# Altium PCB Core.PcbDoc
Units mil, origin at the board's own origin, x right, y up, seen from the top; angles counter-clockwise.
Board outline 2505 x 1435 mil, 2 copper layers (Top Layer, Bottom Layer); 112 components, 85 nets, 387 pads, 118 vias.
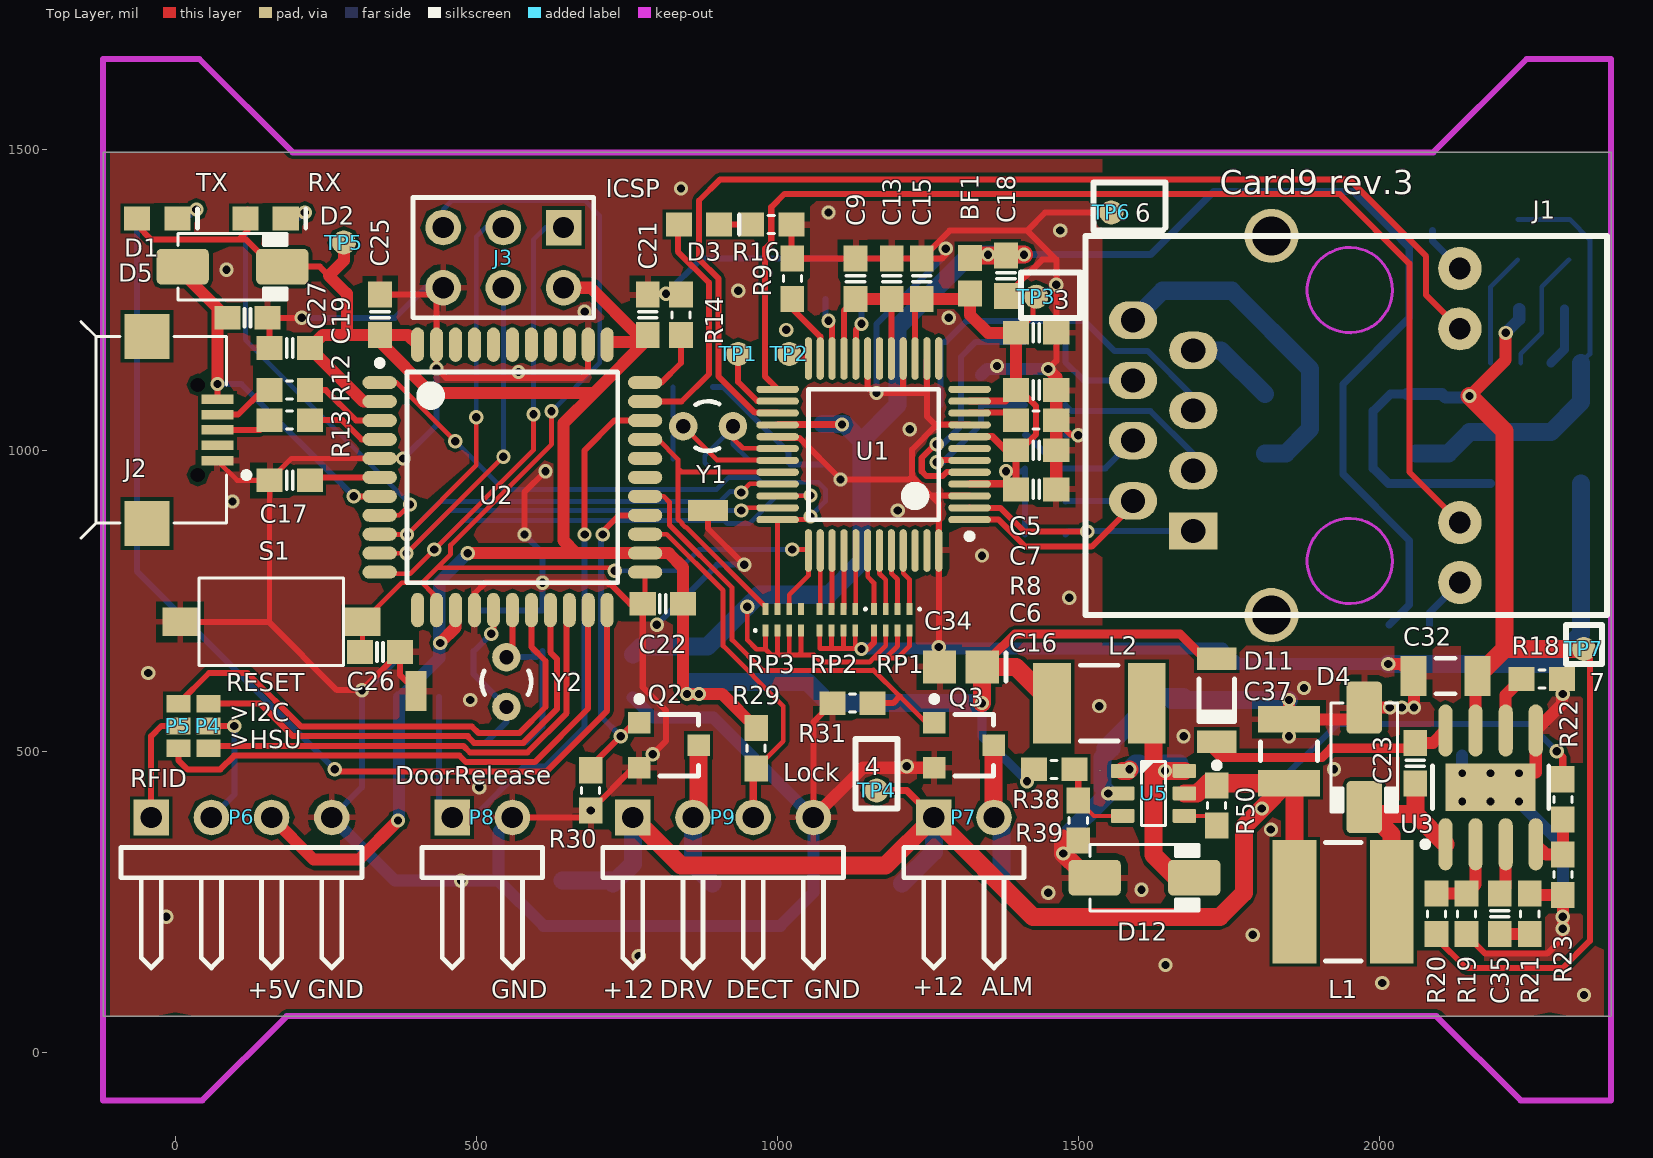
[diagram p0: Top Layer view]
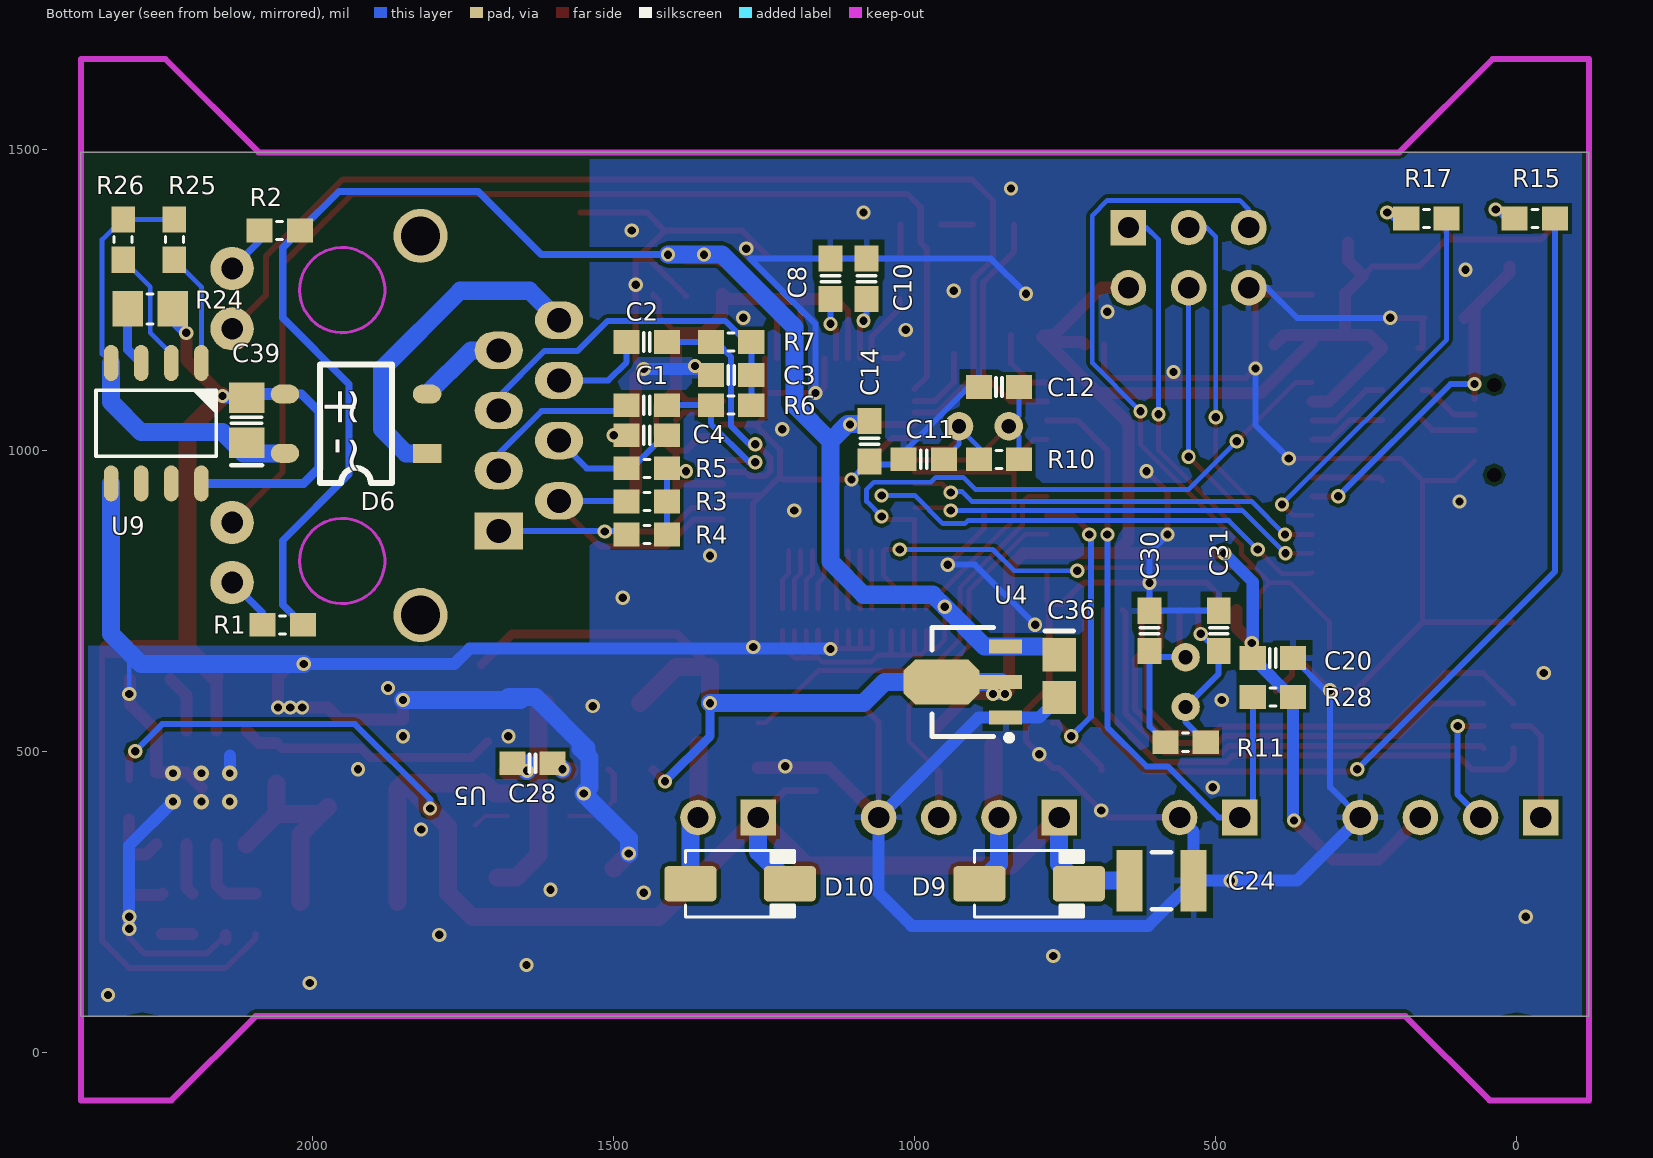
[diagram p1: Bottom Layer view, seen from below]
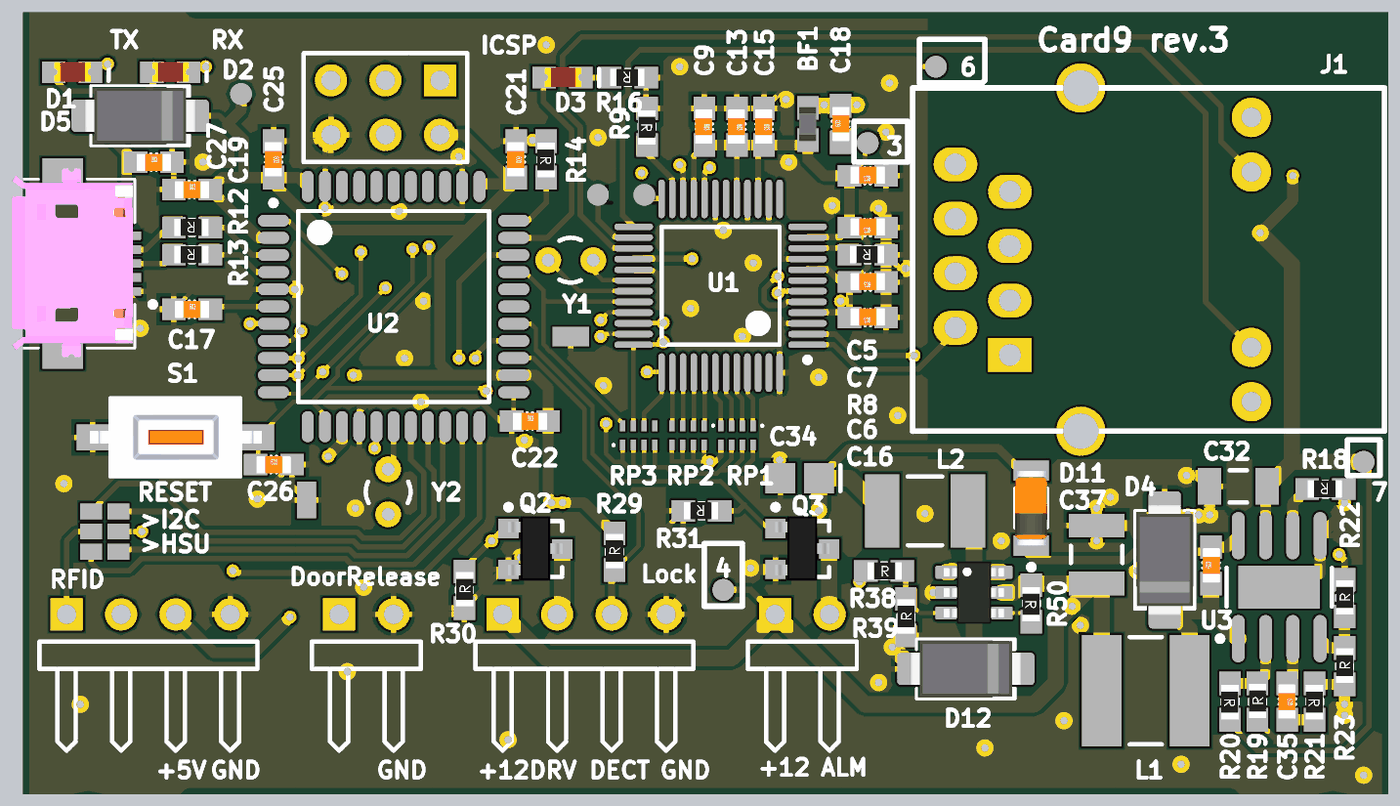
[diagram p2: 3D render of the assembled board from above, using the file's embedded part models]
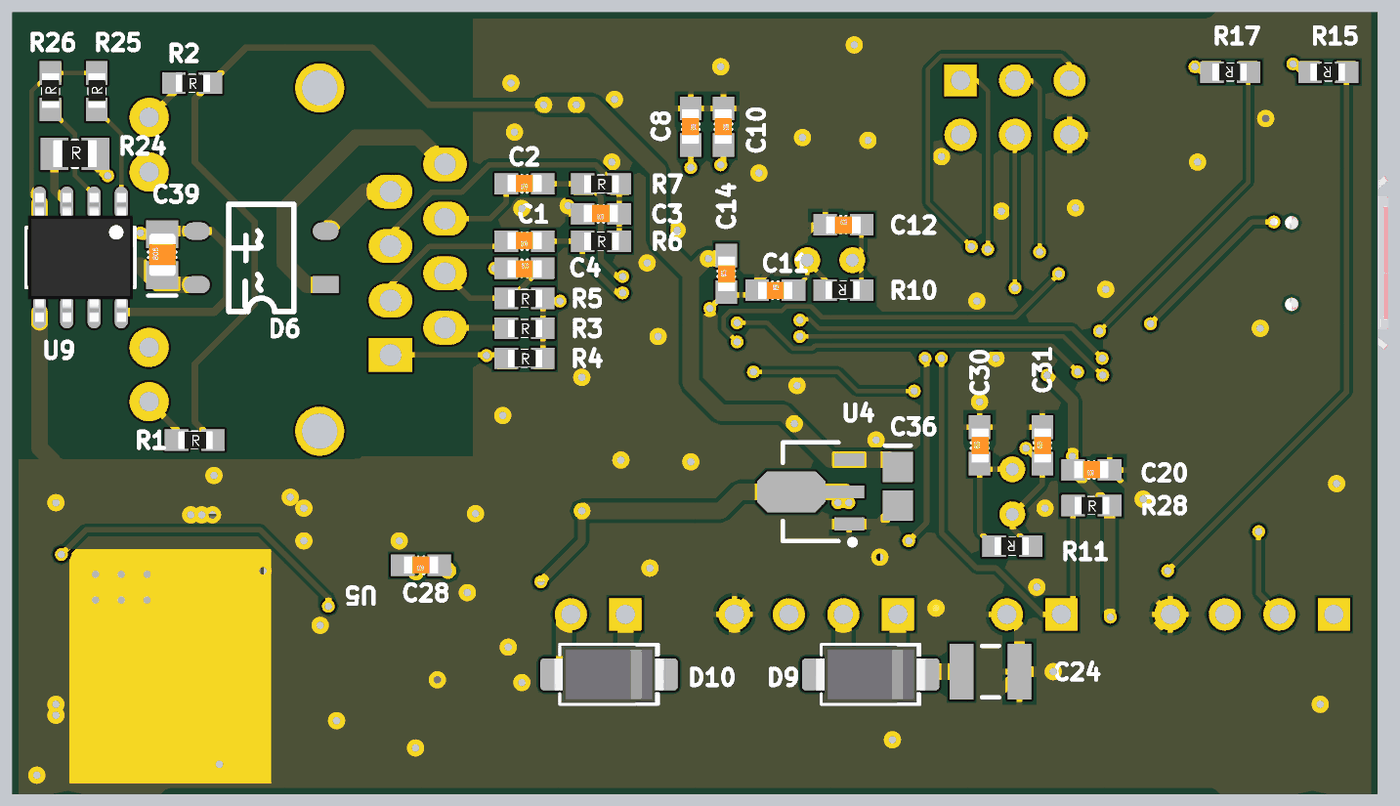
[diagram p3: 3D render of the assembled board from below, using the file's embedded part models]

## Layer stack, top to bottom
Top Solder: solder mask 0.4, Solder Resist, Dk 3.5
Top Layer: signal copper 1.4
Dielectric1: dielectric 12.6, FR-4, Dk 4.8
Bottom Layer: signal copper 1.4
Bottom Solder: solder mask 0.4, Solder Resist, Dk 3.5

## Board outline
-120,60 -120,1495 2385,1495 2385,60

## Design rules (kind name [scope] priority, off if disabled: settings)
Clearance [All] p1: gap=6
ComponentClearance [All] p1: gap=0 collisioncheckmode=3 verticalgap=0 showdistances=FALSE
HoleSize [All] p1: absolutevalues=TRUE maxlimit=196.85 minlimit=11.81 maxpercent=80.000 minpercent=20.000
HoleToHoleClearance [All] p1: gap=7.87 allowstackedmicrovias=TRUE
MinimumSolderMaskSliver [All] p1: minsoldermaskwidth=0
PolygonConnect PolygonConnect_1 [isvia vs IsPolygon] p1: connectstyle=Direct reliefconductorwidth=10 reliefentries=4 polygonreliefangle="90 Angle" airgapwidth=10
PolygonConnect [All] p2: connectstyle=Relief reliefconductorwidth=10 reliefentries=4 polygonreliefangle="90 Angle" airgapwidth=10
RoomDefinition power [InComponentClass('power')] p1 off: confinementstyle=ConfineIn formatcopy=TRUE lockcomponents=FALSE outline 2430,80 4060,80 4060,450 2430,450
RoomDefinition Sheet1 [InComponentClass('Sheet1')] p2 off: confinementstyle=ConfineIn formatcopy=TRUE lockcomponents=FALSE outline -610,-1100 12095,-1100 12095,1685 -610,1685
RoutingVias [All] p1: holewidth=13.78 width=23.62 viastyle="Through Hole" minholewidth=11.81 minwidth=19.68 maxholewidth=19.68 maxwidth=50
SilkToSilkClearance [All] p1: silktosilkclearance=0
SilkToSolderMaskClearance SilkscreenOverComponentPads [IsPad] p1: minsilkscreentomaskgap=0 clearancetoexposedcopper=TRUE
SolderMaskExpansion [All] p1: expansion=4
Width [All] p1: maxlimit=70 minlimit=7 preferedwidth=7
23 further rules are at their usual default settings.

## Classes and differential pairs
component class Sheet1: C1 C2 C3 C4 C8 C10 C11 C12 C17 C26 C27 C30 C31 D1 D2 D3 D9 D10 J1 J2 J3 M1 P4 P5 P6 P7 P8 P9 Q2 Q3 R1 R2 R3 R4 R5 R6 R7 R8 R9 R10 R11 R12 R13 R14 R15 R16 R17 R28 R29 R30 R31 RP1 RP2 RP3 S1 TP1 TP2 U1 U2 Y1 Y2
component class power: BF1 C5 C6 C7 C9 C13 C14 C15 C16 C18 C19 C20 C21 C22 C23 C24 C25 C28 C32 C34 C35 C36 C37 C39 D4 D5 D6 D11 D12 L1 L2 R18 R19 R20 R21 R22 R23 R24 R25 R26 R38 R39 R50 TP3 TP4 TP5 TP6 TP7 U3 U4 U5 U9

## Components (designator, comment, footprint, x,y, rotation, side; value= is the part's Value field where it differs from the comment)
BF1 "GZ1608D121TF" L-1608[0603] 1320,1290 r270 top
C1 "Cap Semi" C-1608[0603] 1445,1075 r0 bottom
C2 "Cap Semi" C-1608[0603] 1445,1180 r0 bottom
C3 "Cap Semi" C-1608[0603] 1305,1125 r0 bottom
C4 "Cap Semi" C-1608[0603] 1445,1025 r180 bottom
C5 "Cap Semi" C-1608[0603] 1430,1195 r180 top
C6 "Cap Semi" C-1608[0603] 1430,1000 r180 top
C7 "Cap Semi" C-1608[0603] 1430,1100 r180 top
C8 "Cap Semi" C-1608[0603] 1140,1285 r270 bottom
C9 "Cap Semi" C-1608[0603] 1130,1285 r270 top
C10 "Cap Semi" C-1608[0603] 1080,1285 r270 bottom
C11 "Cap Semi" C-1608[0603] 985,985 r180 bottom
C12 "Cap Semi" C-1608[0603] 860,1105 r180 bottom
C13 "Cap Semi" C-1608[0603] 1190,1285 r270 top
C14 "Cap Semi" C-1608[0603] 1075,1015 r90 bottom
C15 "Cap Semi" C-1608[0603] 1240,1285 r270 top
C16 "Cap Semi" C-1608[0603] 1430,935 r180 top
C17 "Cap Semi" C-1608[0603] 190,950 r0 top
C18 "Cap Semi" C-1608[0603] 1380,1290 r90 top
C19 "Cap Semi" C-1608[0603] 190,1170 r0 top
C20 "Cap Semi" C-1608[0603] 405,655 r0 bottom
C21 "Cap Semi" C-1608[0603] 785,1225 r270 top
C22 "Cap Semi" C-1608[0603] 810,745 r0 top
C23 "Cap Semi" C-1608[0603] 2060,480 r90 top
C24 "Cap Semi" CAPC3225L 590,285 r180 bottom
C25 "Cap Semi" C-1608[0603] 340,1225 r270 top
C26 "Cap Semi" C-1608[0603] 340,665 r0 top
C27 "Cap Semi" C-1608[0603] 120,1220 r0 top
C28 "Cap Semi" C-1608[0603] 1635,480 r0 bottom
C30 "Cap Semi" C-1608[0603] 610,700 r90 bottom
C31 "Cap Semi" C-1608[0603] 495,700 r90 bottom
C32 "100V" CAPC3216L 2110,625 r0 top
C34 "Tantalum" CAPC2512L 1305,640 r180 top
C35 "Cap Semi" C-1608[0603] 2200,230 r270 top
C36 "Tantalum" CAPC2512L 760,625 r270 bottom
C37 "Cap Semi" CAPC3225L 1850,500 r90 top
C39 "100V" C-2012[0805] 2110,1050 r90 bottom
D1 "TX" LED-1608[0603]-R -30,1385 r0 top
D2 "RX" LED-1608[0603]-R 150,1385 r0 top
D3 "L" LED-1608[0603]-R 870,1375 r0 top
D4 "SS310" DO-214AC 1975,490 r270 top
D5 "SS24" DO-214AC 95,1305 r0 top
D6 "MB6S" MB6S 1810,995 r0 bottom
D9 "SS24" DO-214AC 810,280 r180 bottom
D10 "SS24" DO-214AC 1290,280 r180 bottom
D11 "1N4148" LL-34 1730,585 r90 top
D12 "SS24" DO-214AC 1610,290 r0 top
J1 "RJ45 with PoE" HR911105A 2120,1025 r0 top
J2 "USB Micro Type B" "MICRO USB 3D" 70,1085 r180 top
J3 "ICSP" HDR2X3 645,1370 r180 top
L1 "Inductor" L-5040 1940,250 r180 top
L2 "Inductor" INDC4532N 1535,580 r180 top
P4 "U_I2C_SEL_1" shortPad 55,505 r90 top
P5 "U_I2C_SEL_2" shortPad 5,505 r90 top
P6 "RFID-PN532" HDR1X4H -40,390 r0 top
P7 "Alarm" HDR1X2H 1260,390 r0 top
P8 "Button" HDR1X2H 460,390 r0 top
P9 "Magnet" HDR1X4H 760,390 r0 top
Q2 "SI2302" SOT23B 820,510 r270 top
Q3 "SI2302" SOT23B 1310,510 r270 top
R1 "Res Semi" R-1608[0603] 2050,710 r180 bottom
R2 "Res Semi" R-1608[0603] 2055,1365 r180 bottom
R3 "Res Semi" R-1608[0603] 1445,915 r180 bottom
R4 "Res Semi" R-1608[0603] 1445,860 r180 bottom
R5 "Res Semi" R-1608[0603] 1445,970 r180 bottom
R6 "Res Semi" R-1608[0603] 1305,1075 r180 bottom
R7 "Res Semi" R-1608[0603] 1305,1180 r180 bottom
R8 "Res Semi" R-1608[0603] 1430,1050 r180 top
R9 "Res Semi" R-1608[0603] 1025,1285 r270 top
R10 "Res Semi" R-1608[0603] 860,985 r0 bottom
R11 "Res Semi" R-1608[0603] 550,515 r0 bottom
R12 "Res Semi" R-1608[0603] 190,1100 r180 top
R13 "Res Semi" R-1608[0603] 190,1050 r180 top
R14 "Res Semi" R-1608[0603] 840,1225 r270 top
R15 "Res Semi" R-1608[0603] -30,1385 r0 bottom
R16 "Res Semi" R-1608[0603] 990,1375 r180 top
R17 "Res Semi" R-1608[0603] 150,1385 r0 bottom
R18 "Res Semi" R-1608[0603] 2270,620 r180 top
R19 "Res Semi" R-1608[0603] 2145,230 r90 top
R20 "Res Semi" R-1608[0603] 2095,230 r270 top
R21 "Res Semi" R-1608[0603] 2250,230 r270 top
R22 "Res Semi" R-1608[0603] 2305,420 r90 top
R23 "Res Semi" R-1608[0603] 2305,295 r90 top
R24 "1/4W" R-2012[0805] 2270,1235 r180 bottom
R25 "Res Semi" R-1608[0603] 2230,1350 r90 bottom
R26 "Res Semi" R-1608[0603] 2315,1350 r90 bottom
R28 "Res Semi" R-1608[0603] 405,590 r180 bottom
R29 "Res Semi" R-1608[0603] 965,505 r90 top
R30 "Res Semi" R-1608[0603] 690,435 r90 top
R31 "Res Semi" R-1608[0603] 1125,580 r180 top
R38 "Res Semi" R-1608[0603] 1460,470 r0 top
R39 "Res Semi" R-1608[0603] 1500,385 r90 top
R50 "Res Semi" R-1608[0603] 1730,410 r270 top
RP1 "10K" EXB28V 1190,718.46 r180 top
RP2 "10K" EXB28V 1100,718.46 r180 top
RP3 "10K" EXB28V 1010,718.47 r0 top
S1 "RESET" SW-2pin-SMD 315,715 r180 top
TP1 "DUPLED" TESTPOINT#1 935,1160 r90 top
TP2 "SPDLED" TESTPOINT#2 1020,1160 r90 top
TP3 "3V3A" TESTPOINT#3 1430,1255 r90 top
TP4 "12V" TESTPOINT#3 1165,435 r90 top
TP5 "5V" TESTPOINT#2 280,1345 r90 top
TP6 "GND" TESTPOINT#3 1555,1395 r90 top
TP7 "48V" TESTPOINT#3 2340,670 r90 top
U1 "W5500" TQFP48_N 1160,993 r180 top
U2 "ATMEGA32U4-XUAU" 44A_L 560,955 r0 top
U3 "MP4560" MP1584 2185,440 r90 top
U4 "HT7333" SOT89 920,615 r0 bottom
U5 "MP2359" SOT23-6 1625,430 r180 top
U9 "MP8001DS" SOIC_E150_8 2260,1045 r270 bottom
Y1 "25M" BCY-W2/D2.1 885,1040 r270 top
Y2 "16M" BCY-W2/D2.1 550,615 r0 top

## Footprints (in the part's own frame and the unit in brackets; to place one, negate y for a bottom-side part, rotate by r counter-clockwise, add the part's x,y. Pads: shape width x height; smd on the part's side, far side on the other; paste and mask are expansions set on the pad)
44A_L [mm] "44-Pin Thin Quad Flat Pack 0.8 mm Pitch, IPC High Density"
  oval 1.45x0.55 smd: 1(-5.6,4) 2(-5.6,3.2) 3(-5.6,2.4) 4(-5.6,1.6) 5(-5.6,0.8) 6(-5.6,0) 7(-5.6,-0.8) 8(-5.6,-1.6) 9(-5.6,-2.4) 10(-5.6,-3.2) 11(-5.6,-4) 23(5.6,-4) 24(5.6,-3.2) 25(5.6,-2.4) 26(5.6,-1.6) 27(5.6,-0.8) 28(5.6,0) 29(5.6,0.8) 30(5.6,1.6) 31(5.6,2.4) 32(5.6,3.2) 33(5.6,4)
  oval 0.55x1.45 smd: 12(-4,-5.6) 13(-3.2,-5.6) 14(-2.4,-5.6) 15(-1.6,-5.6) 16(-0.8,-5.6) 17(0,-5.6) 18(0.8,-5.6) 19(1.6,-5.6) 20(2.4,-5.6) 21(3.2,-5.6) 22(4,-5.6) 34(4,5.6) 35(3.2,5.6) 36(2.4,5.6) 37(1.6,5.6) 38(0.8,5.6) 39(0,5.6) 40(-0.8,5.6) 41(-1.6,5.6) 42(-2.4,5.6) 43(-3.2,5.6) 44(-4,5.6)
  silkscreen extent -5.72,-4.45 4.45,4.95, body extent -5,-5 5,5, height 1.2
BCY-W2/D2.1 [mm] "Crystal, Thru-Hole; 2 Leads; Body 2.1 x 6.2 mm (Dia.xH)"
  round 1.2 hole 0.6: 1(0,1.05) 2(0,-1.05)
  silkscreen extent -1.05,-0.53 1.05,0.48
C-1608[0603] [mm] "Chip Capacitor; Body 1.6 x 0.8 mm (LxW typ)"
  rect 1.1x1 smd: 1(-0.85,0) 2(0.85,0)
  silkscreen extent -0.13,-0.38 0.13,0.38, body extent -0.8,-0.42 0.8,0.38, height 0.29
C-2012[0805] [mm] "Chip Capacitor; Body 2.0 x 1.2 mm (LxW typ)"
  rect 1.3x1.5 smd: 1(-0.95,0) 2(0.95,0)
  silkscreen extent -1.9,-0.65 0.13,0.65, body extent -1,-0.64 1,0.62, height 0.78
CAPC2512L [mm] "Chip Capacitor, Body 2.54x1.27mm, IPC High Density"
  rect 1.4x1.4 smd: 1(-0.9,0) 2(0.9,0)
  silkscreen extent -1.9,-0.6 -1.9,0.6, body extent -1.45,-0.82 1.45,0.82, height 1.3
CAPC3216L [mm] "Chip Capacitor, Body 3.2x1.6mm, IPC High Density"
  rect 1.1x1.7 smd: 1(-1.35,0) 2(1.35,0)
  silkscreen extent -0.4,-0.75 0.4,0.75, body extent -1.7,-0.9 1.7,0.9, height 1.3
CAPC3225L [mm] "Chip Capacitor, Body 3.2x2.5mm, IPC High Density"
  rect 1.1x2.6 smd: 1(-1.35,0) 2(1.35,0)
  silkscreen extent -0.4,-1.2 0.4,1.2, body extent -1.7,-1.35 1.7,1.35, height 1.5
DO-214AC [mm] "JEDEC DO214 variation AC. SMA"
  round 0.508 on Mech15: 0(0,0)
  rrect25% 2.2x1.5 smd: 1(-2.1,0) 2(2.1,0)
  silkscreen extent -2.3,-1.4 2.3,1.4, body extent -2.6,-1.3 2.6,1.3, height 2.42
EXB28V [mm] "Chip Resistor Array, (0402x4); SM; 8 Leads; Body 2.10 x 1.10 mm (LxW max)"
  rect 0.25x0.5 smd: 1(-0.75,-0.45) 2(-0.25,-0.45) 3(0.25,-0.45) 4(0.75,-0.45) 5(0.75,0.45) 6(0.25,0.45) 7(-0.25,0.45) 8(-0.75,0.45)
  silkscreen extent -1.23,-0.5 -1.13,-0.4
HDR1X2H [mm] "Connector; Header; 2 Position; Right Angle"
  rect 1.5x1.5 hole 0.9: 1(0,0)
  round 1.5 hole 0.9: 2(2.54,0)
  silkscreen extent -1.27,-6.35 3.81,-1.27
HDR1X4H [mm] "Connector; Header; 4 Position; Right Angle"
  rect 1.5x1.5 hole 0.9: 1(0,0)
  round 1.5 hole 0.9: 2(2.54,0) 3(5.08,0) 4(7.62,0)
  silkscreen extent -1.27,-6.35 8.89,-1.27
HDR2X3 [mm] "Connector; Header; 3x2 Position"
  rect 1.5x1.5 hole 0.9: 1(0,0)
  round 1.5 hole 0.9: 2(0,2.54) 3(2.54,0) 4(2.54,2.54) 5(5.08,0) 6(5.08,2.54)
  silkscreen extent -1.27,-1.27 6.35,3.81
HR911105A [mil] "HR911105A"
  rect 80x62 hole 40: 1(-429,-159)
  oval 80x62 hole 40: 2(-529,-109) 3(-429,-59) 4(-529,-9) 5(-429,41) 6(-529,91) 7(-429,141) 8(-529,191)
  round 72 hole 36: 9(13.91,-244.63) 10(13.91,-145) 11(13.91,176.87) 12(13.91,277)
  round 90 hole 65: 13(-299.08,-298.76) 13(-299.08,331.16)
  Keep-Out Layer circle w5: c-169,-209 r70.8
  Keep-Out Layer circle w5: c-169,241 r70.8
  silkscreen extent -608,-299 258,331
INDC4532N [mm] "Chip Inductor, Body 4.5x3.2mm, IPC Medium Density"
  rect 1.6x3.4 smd: 1(-2,0) 2(2,0)
  silkscreen extent -0.8,-1.6 0.8,1.6, body extent -2.4,-1.7 2.4,1.7, height 1.35
L-1608[0603] [mm] "Chip Inductor, Body 1.6x0.8mm, IPC Medium Density"
  rect 1.1x1 smd: 1(-0.75,0) 2(0.75,0)
  body extent -0.8,-0.41 0.8,0.39, height 0.45
L-5040 [mm]
  rect 1.85x5.2 smd: 1(-2.05,0) 2(2.05,0)
  silkscreen extent -0.75,-2.5 0.75,2.5
LED-1608[0603]-R [mm] "Chip Diode; Body 1.6 x 0.8 mm (LxW typ)"
  rect 1.1x1 smd: 1(-0.85,0) 2(0.85,0)
  silkscreen extent 1.7,-0.4 1.7,0.4, body extent -0.82,-0.44 0.88,0.46, height 0.9
LL-34 [mm]
  rect 0.95x1.65 smd: 1(1.75,0) 2(-1.75,0)
  silkscreen extent -2.87,-0.75 0.9,0.75, body extent -1.75,-0.75 1.75,0.75
MB6S [mm]
  rect 1.2x0.8 smd: 1(0,0)
  oval 1.2x0.8 smd: 2(0,-2.5) 3(6,-2.5) 4(6,0)
  silkscreen extent 1.49,-3.75 4.51,1.25
"MICRO USB 3D" [mm]
  rect 1.35x0.4 smd: 1(0,0) 2(0,0.65) 3(0,1.3) 4(0,1.95) 5(0,2.6)
  round 0 hole 0.6: HOLE(0.827,3.2) HOLE(0.827,-0.6)
  rect 1.9x1.9 smd: ""(2.977,5.25) ""(2.977,-2.65)
  silkscreen extent -1.35,-3.27 5.76,5.87, body extent -0.29,-3.13 5.33,5.67, height 2.79
MP1584 [mm] "SOIC, 8-Leads, Body 4.9x3.9mm (max), Pitch 1.27mm, IPC Medium Density"
  oval 2.2x0.6 smd: 1(-2.4,1.905) 2(-2.4,0.635) 3(-2.4,-0.635) 4(-2.4,-1.905) 5(2.4,-1.905) 6(2.4,-0.635) 7(2.4,0.635) 8(2.4,1.905)
  rect 2x3.8 smd: 5(0,0)
  silkscreen extent -2.52,-2.45 0.9,2.88, body extent -1.95,-2.45 1.95,2.45, height 1.7
R-1608[0603] [mm] "Chip Resistor; Body 1.6 x 0.8 mm (LxW typ)"
  rect 1.1x1 smd: 1(-0.85,0) 2(0.85,0)
  silkscreen extent -0.13,-0.38 0.13,0.38, body extent -1.27,-0.51 1.33,0.49, height 0.48
R-2012[0805] [mm] "Chip Resistor; Body 2.0 x 1.3 mm (LxW typ)"
  rect 1.3x1.5 smd: 1(-0.95,0) 2(0.95,0)
  silkscreen extent -0.13,-0.64 0.13,0.64, body extent -1.5,-0.69 1.5,0.71
shortPad [mil] "short pad"
  rect 29x40 smd: 1(0,0) 2(37,0) 3(74,0)
SOIC_E150_8 [mil]
  oval 60x24 smd: 1(-100,75) 2(-100,25) 3(-100,-25) 4(-100,-75) 5(100,-75) 6(100,-25) 7(100,25) 8(100,75)
  silkscreen extent -55,-100 55,100, body extent -118,-96 118,96, height 69
SOT23-6 [mm]
  round 0.5 on Mech15: 0(0,0)
  rrect25% 1x0.6 smd: 1(1.3,-0.95) 2(1.3,0) 3(1.3,0.95) 4(-1.3,0.95) 5(-1.3,0) 6(-1.3,-0.95)
  silkscreen extent -0.51,-1.35 0.51,1.35, body extent -1.4,-1.45 1.4,1.45, height 1.44
SOT23B [mm] "SOT-23; 3 Leads; Body 3.0 x 2.6 mm, inc. leads (LxW max)"
  rect 0.9x0.95 smd: 1(-0.95,-1.25) 2(0.95,-1.25) 3(0,1.25)
  silkscreen extent -2.07,-1.37 1.3,1.25, body extent -1.52,-1.27 1.48,1.27, height 1.1
SOT89 [mm] "SOT89, 3-Leads, Body 4,5x2,4mm (max), Pitch 1,50mm, Lead Span 4,1mm, IPC Medium Density"
  rect 1.4x0.6 smd: 1(-1.8,1.5) 3(-1.8,-1.5)
  rect 1.8x0.6 smd: 2(-1.6,0)
  oct 3.2x1.9 smd: 2(0.9,0)
  silkscreen extent -2.07,-2.3 1.3,2.47, body extent -1.3,-2.3 1.3,2.3, height 1.6
SW-2pin-SMD [mm] "3*6*2.5mm Button"
  rect 1.5x1.2 smd: 1(0.1,0) 2(7.8,0)
  silkscreen extent 0.9,-1.85 7,1.85, body extent -0.08,-1.8 7.92,1.8, height 2.5
TESTPOINT#1 [mil]
  round 40 smd mask-40: 1(0,0)
TESTPOINT#2 [mil]
  round 40 smd mask-100: 1(0,0)
TESTPOINT#3 [mil]
  round 40 smd: 1(0,0)
TQFP48_N [mm] "48-Pin Thin Quad Flat Pack 0.5 mm Pitch, IPC Medium Density"
  oval 1.8x0.3 smd: 1(-4.05,2.75) 2(-4.05,2.25) 3(-4.05,1.75) 4(-4.05,1.25) 5(-4.05,0.75) 6(-4.05,0.25) 7(-4.05,-0.25) 8(-4.05,-0.75) 9(-4.05,-1.25) 10(-4.05,-1.75) 11(-4.05,-2.25) 12(-4.05,-2.75) 25(4.05,-2.75) 26(4.05,-2.25) 27(4.05,-1.75) 28(4.05,-1.25) 29(4.05,-0.75) 30(4.05,-0.25) 31(4.05,0.25) 32(4.05,0.75) 33(4.05,1.25) 34(4.05,1.75) 35(4.05,2.25) 36(4.05,2.75)
  oval 0.3x1.8 smd: 13(-2.75,-4.05) 14(-2.25,-4.05) 15(-1.75,-4.05) 16(-1.25,-4.05) 17(-0.75,-4.05) 18(-0.25,-4.05) 19(0.25,-4.05) 20(0.75,-4.05) 21(1.25,-4.05) 22(1.75,-4.05) 23(2.25,-4.05) 24(2.75,-4.05) 37(2.75,4.05) 38(2.25,4.05) 39(1.75,4.05) 40(1.25,4.05) 41(0.75,4.05) 42(0.25,4.05) 43(-0.25,4.05) 44(-0.75,4.05) 45(-1.25,4.05) 46(-1.75,4.05) 47(-2.25,4.05) 48(-2.75,4.05)
  silkscreen extent -4.18,-2.75 2.75,3.57, body extent -3.5,-3.5 3.5,3.5, height 1.6

## Part data
BF1: library part Inductor
C1 C2 C3 C4 C5 C6 C7 C8 C9 C10 C11 C12 C13 C14 C15 C16 C17 C18 C19 C20 C21 C22 C23 C24 C25 C26 C27 C28 C30 C31 C35 C37: "Capacitor (Semiconductor SIM Model)"
C32 C34 C36 C39: library part "Cap Semi", "Capacitor (Semiconductor SIM Model)"
D1 D2 D3: library part LED1, "Typical RED GaAs LED"
D4 D5 D9 D10 D12: library part "D Schottky", "Schottky Diode"
D6: library part Bridge1, "Full Wave Diode Bridge"
D11: library part "D Zener", "Zener Diode"
J1: library part HLJ-6115ANL
J2: library part USB_Micro_TypeB, "Connector SMD USB Micro Type B middle mount"
J3: library part PINHD-2X3
P4 P5: library part "Header 3", "Header, 3-Pin"
P6 P9: library part "Header 4H", "Header, 4-Pin, Right Angle"
P7 P8: library part "Header 2H", "Header, 2-Pin, Right Angle"
Q2 Q3: "N-Channel MOSFET"
R1 R2 R3 R4 R5 R6 R7 R8 R9 R10 R11 R12 R13 R14 R15 R16 R17 R18 R19 R20 R21 R22 R23 R25 R26 R28 R29 R30 R31 R38 R39 R50: "Semiconductor Resistor"
R24: library part "Res Semi", "Semiconductor Resistor"
RP1 RP2 RP3: library part RPACK4
S1: library part SW-PB, "Switch"
TP1 TP2 TP3 TP4 TP5 TP6 TP7: library part Plug, "Plug"
U1: library part DRIVER-W5500
U3: "2A, 2MHz, 55V Step-Down Converter"
U4: library part HT73XX, "Low Power Consumption LDO"
U5: "1.2A, 24V, 1.4MHz  Step-Down Converter"
U9: library part MP8001
Y1 Y2: library part XTAL, "Crystal Oscillator"

## Free pads (board coordinates)
  round 0 hole 118.11: 0(0,0) 1(2283.46,0) 2(2283.46,1574.8) 3(0,1574.8)
  rect 35.43x66.93 smd: 0(400,600)
  rect 66.93x35.43 smd: 0(885,900)

## Via types
v1: diameter 23.62, hole 13.78, Top Layer to Bottom Layer, 112 vias
v2: diameter 25.98, hole 12.99, Top Layer to Bottom Layer, tented top, 6 vias

## Nets (pads, with @x,y where several pads share a name; then routed paths per layer and width w, separated by ;. In a path a pad name is that pad's centre, name@x,y a point inside that pad or via, vN(x,y) a via of type N, cw(c..) or ccw(c..) an arc to the next point about the centre after c; other vN are vias at no path point)
3V3: BF1.1 C14.2 C18.2 C36.1 R1.2 R2.2 RP1.6 RP1.7 RP1.8 RP3.1 RP3.2 RP3.3 RP3.4 U1.28 U4.3 | length 3487
  Top Layer w8: v1(950,740) 950,685 965.47,669.53 980.47,669.53 ; RP3.1 980.47,669.53 ; 999.84,659.84 1019.84,659.84 ; RP3.2 1000.16,660.16 989.84,660.16 980.47,669.53 ; RP3.3 1019.84,659.84 ; RP3.4 1039.53,664.53 1034.84,659.84 ; RP1.6 1180.16,675.16 1160,655 ; RP1.7 1199.84,674.84 1180,655 ; RP1.8 1219.53,674.53 1200,655 1180,655 ; 1019.84,659.84 1034.84,659.84 ; 1034.84,659.84 1061.3,659.84 1072.96,648.19 1153.19,648.19 1160,655 ; 1160,655 1180,655
  Top Layer w12: U1.28@1000.55,1042.68 v1(1107.68,1042.68)
  Top Layer w30: BF1.1 1323.94,1323.46 C18.2 ; C18.2@1381.54,1325 v1(1410,1325)
  Bottom Layer w12: v1(1410,1325) 1620,1325 1725,1430 1956.54,1430 R2.2 2050,1336.54 2050,1220 1940,1110 1940,960 2050,850 2050,743.46 R1.2
  Bottom Layer w30: C36.1 773.62,674.06 U4.3 884.06,674.06 v1(950,740) 970,760 1085,760 1140,815 1140,1015 ; C14.2@1075,1043.46 1111.54,1043.46 1140,1015 ; v1(1410,1325) v1(1350,1325) 1320,1325 1200,1205 1200,1075 1140,1015
3V3A: BF1.2 C5.2 C6.2 C7.2 C9.2 C13.2 C15.2 C16.2 R3.2 R4.2 R5.2 TP3.1 U1.4 U1.8 U1.11 U1.15 U1.17 U1.21 | length 1413.6
  Top Layer w8: C5.2 1425,1223.46 1425,1250 TP3.1 ; TP3.1@1435,1255 TP3.1@1435,1260
  Top Layer w10: U1.21@1110.79,1152.91 1110.79,1232.32 C9.2 ; U1.17@1189.53,1152.91 1190,1153.39 C13.2 ; U1.15@1228.9,1152.91 1228.9,1240.43 C15.2 ; C6.2@1380,1000 C6.2 1403.43,1000 1430,1026.57 1430,1073.43 1403.43,1100 C7.2 ; C16.2@1387.28,944.25 C16.2
  Top Layer w12: U1.4@1319.45,944.25 C16.2@1387.28,944.25 ; U1.8@1319.45,1022.99 1357.01,1022.99 C6.2@1380,1000 ; U1.11@1319.45,1082.05 1378.58,1082.05 C7.2 ; v1(1380,965) 1396.54,965 ; C16.2 1396.54,965 ; C6.2 1396.54,965
  Top Layer w20: C9.2 C13.2 C15.2 1311.06,1251.54 BF1.2 1320,1225 1350,1195 C5.2 C7.2
  Bottom Layer w10: v1(1380,965) 1406.54,965 R5.2 R3.2 R4.2
5V: C19.2 C20.2 C21.2 C22.2 C25.2 C34.1 D1.1 D2.1 D5.2 D11.1 J3.2 L2.2 P6.3 R28.2 R29.2 R38.1 TP5.1 U2.2 U2.14 U2.24 U2.34 U2.44 U4.2 | length 4899.1
  Top Layer w10: D1.1@-63.46,1373.46 -40,1350 105,1350 ; D2.1@120,1400 120,1365 105,1350 ; 255,1290 240,1305 D5.2 162.68,1305 117.68,1350 105,1350
  Top Layer w15: C34.1@1355,655 1395,695 1668.9,695 D11.1@1720,643.9 ; v1(1415,450) R38.1@1435,470
  Top Layer w20: P6.3 230,320 305,320 v1(370,385) ; TP5.1 280,1315 255,1290 285,1260 285,1191.54 ; U2.2 312.48,1080.98 C19.2 245,1191.54 285,1191.54 ; U2.44 386.46,1191.54 C25.2 ; v1(440,680) 465.51,705.51 U2.14 ; v1(485.98,829.02) 665.98,829.02 ; J3.2 690,1270 768.46,1191.54 C21.2 773.46,1180 722.01,1180 U2.34 ; C21.2@788.27,1188.27 695,1095 ; R29.2 908.46,595 v1(870,595) v1(850,595) 843.46,601.54 C22.2 843.46,805.31 819.76,829.02 U2.24 665.98,829.02 ; 285,1191.54 C25.2 ; C25.2 340,1180 425,1095 695,1095 ; 665.98,829.02 645,850 645,1045 695,1095
  Top Layer w30: v1(1340,580) 1340.43,580.43 C34.1 1396.26,640 L2.2
  Bottom Layer w15: v1(1340,580) 1340,525 v1(1415,450)
  Bottom Layer w20: P6.3 P6.3@171.54,390 ; v1(370,385) 371.54,386.54 R28.2 373.46,590 C20.2 438.46,781.5 v1(485.98,829.02) ; v1(850,595) v1(870,595) 870,602.01 U4.2@857.01,615
  Bottom Layer w30: U4.2@857.01,615 955.43,615 1050.43,615 1085.43,580 1152.13,580 v1(1340,580)
12V: C24.1 C37.1 D9.2 D10.2 L1.2 P7.1 P9.1 R22.2 R50.1 TP4.1 U5.5 | length 2835.9
  Top Layer w12: TP4.1 1215,435 P7.1 ; v1(2295,500) 2305,490 R22.2
  Top Layer w30: P9.1 840,310 1180,310 P7.1 1425,225 1735,225 1775,265 1775,375 v1(1805,405) C37.1@1846.85,446.85 ; U5.5 1697.6,430 1702.19,434.59 1702.83,434.59 1716.87,448.62 1716.87,449.27 1719.28,446.85 C37.1@1846.85,446.85 ; L1.2 1859.29,437.56 C37.1 C37.1@1846.85,446.85
  Bottom Layer w10: 1805,420 1930,545 2250,545 v1(2295,500)
  Bottom Layer w12: v1(1805,405) 1805,420
  Bottom Layer w30: C24.1 D9.2@722.32,285 ; D9.2 760,312.68 P9.1 ; D10.2 1260,332.68 P7.1
48V: C32.2 C39.2 D6.3 R20.2 R24.2 TP7.1 U3.7 U9.8 | length 2176.5
  Top Layer w10: R20.2 2095,189.64 2144.64,140 2305,140 2350,185 2350,660 TP7.1
  Top Layer w20: v1(2150,1090) 2210,1150 v1(2210,1195) ; U3.7 2160,621.85 C32.2
  Top Layer w30: v1(2150,1090) 2208.15,1031.85 2208.15,670 ; C32.2 2208.15,670 ; TP7.1 2208.15,670
  Bottom Layer w15: D6.3 2018.43,1093.43 1990,1065 1990,970 2015,945 U9.8
  Bottom Layer w20: D6.3 2103.98,1093.43 C39.2 2147.4,1087.4 v1(2150,1090) ; v1(2210,1195) 2232.6,1217.6 R24.2
ACT: J1.11 U1.27 | length 1847.7
  Top Layer w10: U1.27@1000.55,1062.36 962.64,1062.36 902.54,1122.46 902.54,1285.09 870,1317.63 870,1415 905,1450 1950,1450 2077.93,1322.07 2077.93,1257.84 J1.11
ALM_OUT: D10.1 P7.2 Q3.3 | length 235.6
  Top Layer w30: Q3.3 1359.21,390.79 P7.2
  Bottom Layer w30: P7.2 1372.68,377.32 D10.1
ARD_D4: P9.3 R29.1 U2.25 | length 607.4
  Top Layer w8: U2.25 816.54,860.51 910,767.06 910,675 1010,575 1010,516.54 R29.1
  Top Layer w12: P9.3 960,466.54 R29.1
ARD_D5: P8.1 R28.1 U2.31 | length 1077
  Top Layer w10: v1(680,860) 680,1000 729.49,1049.49 U2.31
  Bottom Layer w10: R28.1 438.46,411.54 P8.1 495,390 580,475 615,475 680,540 v1(680,860) v1@680,865
ARD_D6: Q3.1 R31.1 U2.27 | length 759.8
  Top Layer w8: U2.27 811.5,923.5 821,914 821,875.86 925,771.86 925,685 975.81,634.19 1158.99,634.19 1159.8,635 1203.6,591.2 1247.4,547.4 Q3.1
  Top Layer w10: R31.1 1192.4,580 1203.6,591.2
ARD_D12: Q2.1 R30.2 U2.26 | length 563.7
  Top Layer w10: R30.2 690,475 v1(740,525) 762.4,547.4 Q2.1 ; v1(710,860) 710,865 737.01,892.01 U2.26
  Bottom Layer w10: v1(710,860) 710,865 707.19,862.19 707.19,557.81 v1(740,525)
ARD_D13: D3.1 U2.32 | length 394.7
  Top Layer w10: U2.32 840.98,1080.98 886.54,1126.54 886.54,1278.46 835,1330 D3.1@835,1375
AVR_RST: C26.1 J3.5 RP3.6 S1.1 U1.37 U2.13 | length 1977
  Top Layer w8: C26.1@311.06,669.53 S1.1 376.06,780 410,780 ; U2.13 428.07,740.47 428.07,761.93 410,780 ; v1(625,1065) 625,1010 457.4,842.4 457.4,827.4 435,805 ; v1@730,805 435,805 ; RP3.6 1019.84,759.84 1051.73,791.73 U1.37 U1.37@1051.73,834.02 ; v1(1025,835) U1.37@1050.75,835 ; 410,780 435,805
  Bottom Layer w8: 445,1400 460,1415 680,1415 705.2,1389.8 705.2,1145.2 v1(625,1065) ; v1(730,800) 835,800 870,835 v1(1025,835)
ETH_INT: RP3.7 U1.36 U2.1 | length 1091.5
  Top Layer w8: U2.1 367.52,1112.48 v1(465,1015) ; RP3.7 1000.16,884.8 1000.55,885.2 1050.2,885.2 v1(1055,890)
  Bottom Layer w8: v1(465,1015) 545,935 899.36,935 919.36,955 965,955 973.19,946.81 1068.19,946.81 1080,935 1080,915 v1(1055,890)
ETH_MISO: J3.1 U1.34 U2.11 | length 1471.6
  Top Layer w8: U2.11 342.05,795 390,795 v1(430,835) 595,1000 v1(595,1060) ; U1.34@1000.55,924.57 1055.43,924.57 v1(1055,925)
  Bottom Layer w8: v1(430,835) 478.19,883.19 911.81,883.19 916.81,878.19 953.19,878.19 1000,925 v1(1055,925) ; v1(595,1060) 595,1350 615,1370 J3.1
ETH_MOSI: J3.4 U1.35 U2.10 | length 1200.4
  Top Layer w8: U2.10 v1(384.02,829.02) 384.86,829.02 v1(545,989.15) ; v1(940,900) 944.42,904.42 U1.35
  Bottom Layer w8: v1(384.02,829.02) 384.86,829.02 455.85,900 v1(940,900) ; v1(545,989.15) J3.4
ETH_SCK: J3.3 U1.33 U2.9 | length 1291.4
  Top Layer w8: U2.9 340.04,860 v1(385,860) 500,975 v1(500,1055) ; v1(940,930) 954.25,944.25 U1.33@1000.55,944.25
  Bottom Layer w8: v1(385,860) 440,915 905,915 921.69,931.69 938.31,931.69 v1(940,930) ; v1(500,1055) 500,1355 515,1370 J3.3
ETH_SCS: RP3.8 U1.32 U2.30 | length 546
  Top Layer w8: U2.30 802.01,1017.99 835,985 835,970 ; RP3.8 980.47,740.37 848.56,872.28 847.39,872.28 841.54,878.14 841.54,879.31 835,885.85 835,970 ; U1.32@1000.55,963.94 841.06,963.94 835,970
GND: C3.2 C4.1 C5.1 C6.1 C7.1 C8.1 C9.1 C10.1 C11.1 C12.1 C13.1 C14.1 C15.1 C16.1 C17.1 C18.1 C19.1 C20.1 C21.1 C22.1 C24.2 C25.1 C26.2 C27.2 C30.2 C31.2 C32.1 C34.2 C36.2 C37.2 D4.1 D12.1 J2.5 J3.6 P6.4 P8.2 P9.4 pad.0@400,600 pad.0@885,900 Q2.2 Q3.2 R8.1 R9.1 R14.1 R16.1 R18.1 R19.1 R21.1 R23.1 R30.1 R31.2 R39.1 RP1.5 RP2.5 RP2.6 RP2.7 RP2.8 S1.2 TP6.1 U1.3 U1.9 U1.14 U1.16 U1.19 U1.29 U1.48 U2.5 U2.15 U2.23 U2.35 U2.43 U3.5 U4.1 U5.2 U9.5 | length 13212.6
  Top Layer w8: J2.5 102.64,950 C17.1 ; 156.54,716.54 C17.1 ; v1(378.5,986.5) U2.5 193.03,986.5 C17.1 ; C22.1 780.47,748.94 U2.23 ; RP2.5 1070.47,670.47 1090.16,670.47 ; RP2.6 1090.16,670.47 ; RP2.7 1109.84,670.47 ; v1@1129.53,670.47 RP2.8 ; v1@1140.47,670.47 1109.84,670.47 ; 1090.16,670.47 1109.84,670.47
  Top Layer w10: S1.2 155,715 268.46,601.54 v1(310,601.54) C26.2 373.46,626.54 pad.0@400,600 ; C19.1@163.46,1170 C19.1 156.54,1216.93 C27.2 v1(210,1220) ; C25.1 433.46,1258.46 J3.6@434.02,1259.02 ; J3.6@434.02,1289.02 J3.6@434.02,1259.02 ; U2.15 497.01,762.01 515,780 v1(610,780) 717.74,780 720.55,777.19 723.4,777.19 755.59,745 C22.1 776.54,606.54 815,568.07 815,516.81 v1(793.19,495) Q2.2 761.06,472.6 v1(690,401.54) 678.46,390 P8.2 ; v1(580,860) 580,930 v1(615,965) ; U2.35 685.98,1130.98 675,1120 450,1120 v1(434.02,1135.98) U2.43 J3.6@434.02,1259.02 ; pad.0@885,900 885,870 v1(945,810) ; U1.29@1000.55,1022.99 1003.33,1020.21 1037.08,1020.21 1105,952.29 v1(1105,951.54) 1219.54,951.54 1224,956 ; R16.1 1023.46,1320 R9.1 C9.1 C13.1 C15.1 ; P9.4 1060,548.46 R31.2 ; v1@1150,670 1160.47,680.47 RP1.5 ; U1.19 1150.16,1104.84 1160,1095 v1(1165,1095) 1200,1095 ; U1.16 1209.21,1104.21 1200,1095 ; U1.14 1248.58,1095 ; v1(1268.27,673.27) U1.48 1268.27,911.73 1255.43,924.57 ; v1(1280,1335) 1280,1325 1273.46,1318.46 C15.1 ; U1.3@1319.45,924.57 1255.43,924.57 ; U1.9@1319.45,1042.68 1262.32,1042.68 ; C18.1 1440,1316.54 1463.46,1316.54 ; v1(1450,1135) 1463.46,1148.46 C5.1 v1(1463.46,1275) 1463.46,1316.54 ; R8.1 1488.46,1025 v1(1500,1025) ; TP6.1 1445,1395 1415,1365 ; R19.1 2145,194.64 2175.76,163.88 2278.88,163.88 2305,190 v1(2305,205) ; 1200,1095 1248.58,1095 ; 1224,956 1224,1001.26 1262.32,1039.58 1262.32,1042.68 ; 1224,956 1255.43,924.57 ; C15.1 1286.54,1365 1415,1365 ; 1248.58,1095 1248.58,1056.42 1262.32,1042.68 ; 1415,1365 1463.46,1316.54
  Top Layer w20: P9.4 1142.6,472.6 Q3.2 ; v1(1450,1135) 1463.46,1121.54 C7.1 R8.1 C6.1 C16.1 ; v1(1850,585) C37.2 1955.47,553.15 D4.1 v1(2017.68,572.68) ; v1(2015,645) 2036.85,645 C32.1 2057.68,624.17 v1(2057.68,572.68) ; R19.1@2145,187.57 R19.1@2145,194.64 ; U3.5@2185,440 2210,465 2260,465 2260,534.49 2303.46,577.95 R18.1 ; R21.1 2251.93,261.54 R23.1 v1(2305,225) v1(2305,205)
  Top Layer w30: v1(1475,330) 1475,355 ; v1@1477.32,327.68 D12.1@1500,305
  Bottom Layer w7: v1(2305,595) 2305,665 2310,670
  Bottom Layer w10: v1(210,1220) 365,1220 415,1270 J3.6 ; P6.4 310,440 v1(310,601.54) 318.07,601.54 C20.1 ; v1(378.5,986.5) 434.02,1042.01 v1(434.02,1135.98) ; C31.2 C30.2 v1(610,780) 610,830 v1(580,860) ; v1(800,710) 900,810 v1(945,810) ; v1(815,1260) 873.46,1318.46 C10.1 C8.1 1273.46,1318.46 1165,1210 v1(1165,1095) ; C12.1 910.65,1105 1018.46,997.19 C11.1 1018.46,980 1021.93,976.54 C14.1@1075,976.54 ; C14.1 v1(1105,951.54) ; C4.1 v1(1500,1025)
  Bottom Layer w15: 1545,505 1555,505
  Bottom Layer w20: P6.4 365,285 C24.2 ; P8.2 536.85,366.85 C24.2 ; C36.2@759.57,589.57 C36.2 793.62,555.94 U4.1 894.06,555.94 P9.4 1060,265 1005,210 611.85,210 C24.2 ; v1@1140,670.55 1739.45,670.55 1765,645 v1(2015,645) ; C3.2 1348.46,1135 v1(1450,1135) ; v2(2137.76,463.62) 2137.76,492.6 ; v2(2232.24,416.38) 2305,343.62 v1(2305,225) v1(2305,205)
  Bottom Layer w30: v1(1475,330) 1475,355 v1(1550,430) 1540,440 1540,490 1555,505 ; 1545,505 1630,590 1675,590 ; 1655,585 v1(1850,585) ; v1(2015,645) 2285,645 2305,665 ; 2310,670 2335,695 U9.5
  other v1: 2340,95 2005,115 1645,145 770,160 1790,195 -15,225 1450,265 1605,270 475,285 1820,370 505,440 1925,470 1215,475 1675,525 1850,525 2037.32,572.68 1535,575 490,585 1875,605 -45,630 1140,670 1485,755 1340,825 1200,900 95,915 1220,1035 570,1130 1365,1140 1015,1200 1285,1220 680,1230 935,1265 85,1300 1470,1365 1085,1395 840,1435
  other v2: 2137.76,416.38 2185,416.38 2185,463.62 2232.24,463.62
LINK: J1.10 U1.25 | length 1902.4
  Top Layer w10: U1.25@1000.55,1101.73 980,1122.28 980,1335 990,1345 990,1404 1012,1426 1934,1426 2050,1310 2050,963.91 J1.10
  Bottom Layer w10: J1.10@2130,883.91 J1.10
MAG_CTL: D9.1 P9.2 Q2.3 | length 247.4
  Top Layer w30: P9.2 869.21,399.21 Q2.3
  Bottom Layer w30: P9.2 860,312.68 D9.1
NetC1_2: C1.2 J1.3 | length 274.1
  Bottom Layer w10: C1.2 1488.46,1065 1620,1065 1691,994 J1.3
NetC2_2: C2.2 J1.6 | length 158.6
  Bottom Layer w10: C2.2 1478.46,1146.54 1509,1116 J1.6
NetC3_1: C3.1 J1.5 R6.2 R7.2 | length 614.2
  Bottom Layer w10: R6.2 R7.2 1280,1180 1315,1215 1510,1215 1560,1165 1615,1165 1691,1089 J1.5
NetC4_2: C4.2 J1.4 R5.1 | length 243.3
  Bottom Layer w10: C4.2 1415.13,1025 1470.13,970 R5.1 1545,970 J1.4 J1.4@1591,994
NetC8_2: C8.2 U1.20 | length 102.6
  Top Layer w10: U1.20@1130.47,1152.91 1130.47,1200.47 v1(1140,1210)
  Bottom Layer w10: v1(1140,1210) C8.2
NetC10_2: C10.2 U1.22 | length 110.3
  Top Layer w10: v1(1085,1215) 1091.1,1208.9 U1.22@1091.1,1152.91
  Bottom Layer w10: C10.2 1080,1220 v1(1085,1215) v1@1090,1210
NetC11_2: C11.2 R10.2 U1.30 Y1.1 | length 250.3
  Top Layer w8: Y1.1 926.34,1020 943.03,1003.31 U1.30@1000.55,1003.31
  Bottom Layer w8: R10.2@883.57,975.1 879.46,979.2 879.46,990.8 Y1.1@926.34,1037.67 ; Y1.1 Y1.1@926.34,1037.67 ; C11.2 926.34,1010.2 Y1.1@926.34,1037.67
NetC12_2: C12.2 R10.1 U1.31 Y1.2 | length 314.4
  Top Layer w8: Y1.2 900.04,983.62 U1.31@1000.55,983.62
  Bottom Layer w8: R10.1 826.54,1022.87 Y1.2 826.54,1057.13 C12.2
NetC17_2: C17.2 U2.6 | length 118.1
  Top Layer w10: C17.2 228.46,955 U2.6
NetC23_1: C23.1 D4.2 L1.1 U3.1 | length 371.2
  Top Layer w30: D4.2 D4.2@1986.81,395.51 ; L1.1 2020.71,361.61 D4.2@1986.81,395.51 ; C23.1 2060,395.51 ; U3.1 2060,395.51 ; D4.2@1986.81,395.51 2060,395.51
NetC23_2: C23.2 D11.2 U3.8 | length 429.2
  Top Layer w15: D11.2@1710,516.1 1736.1,490 1905,490 1920,505 2051.54,505 C23.2
  Top Layer w20: C23.2 2088.98,513.46 U3.8
NetC28_1: C28.1 U5.1 | length 32.9
  Top Layer w30: U5.1 1582.4,467.4 v1(1585,470)
  Bottom Layer w30: v1(1585,470) 1595,480 C28.1
NetC28_2: C28.2 D12.2 L2.1 U5.6 | length 429.4
  Top Layer w30: L2.1 1625,568.74 1625,470 ; U5.6 v1(1644.19,467.4) 1627.6,467.4 1625,470 ; D12.2 1662.68,290 1625,327.68 1625,470
  Bottom Layer w30: v1(1644.19,467.4) 1644.19,480 C28.2
NetC30_1: C30.1 R11.2 U2.17 Y2.1 | length 311
  Top Layer w10: Y2.1 560,666.34 U2.17
  Bottom Layer w10: Y2.1 599.8,656.34 C30.1 610,541.54 R11.2 ; C30.1@595,666.54 C30.1@596.34,665.2
NetC31_1: C31.1 R11.1 U2.16 Y2.2 | length 270.9
  Top Layer w10: v1(525,695) 528.5,698.5 U2.16
  Bottom Layer w10: R11.1 550,548.46 Y2.2 495,628.66 C31.1 496.54,666.54 v1(525,695)
NetC35_1: C35.1 U3.3 | length 86.2
  Top Layer w20: C35.1 2210,273.46 U3.3
NetC35_2: C35.2 R21.2 | length 50
  Top Layer w20: C35.2 R21.2
NetC39_1: C39.1 D6.4 R25.2 R26.2 U9.4 | length 719.1
  Bottom Layer w8: R25.2 R26.2 2316.54,1383.46 2350,1350 2350,1160 U9.4
  Bottom Layer w30: D6.4@2061.22,995 2115,995 2150,1030 2285,1030 2335,1080 U9.4
NetD1_2: D1.2 R15.2 | length 65.8
  Top Layer w8: D1.2@6.93,1400 v1(35,1400)
  Bottom Layer w8: R15.2 20,1385 v1(35,1400)
NetD2_2: D2.2 R17.2 | length 58.7
  Top Layer w8: D2.2@191.93,1395 v1(215,1395)
  Bottom Layer w8: R17.2 205,1385 v1(215,1395)
NetD3_2: D3.2 R16.2 | length 53.1
  Top Layer w10: D3.2 R16.2
NetJ1_9: J1.9 R1.1 | length 91.3
  Bottom Layer w12: R1.1 2083.46,729.92 J1.9
NetJ1_12: J1.12 R2.1 | length 102.4
  Bottom Layer w12: R2.1 2088.46,1347.45 J1.12 J1.12@2154.54,1302
NetJ2_2: J2.2 R12.2 | length 103.3
  Top Layer w10: J2.2 104.41,1059.41 145,1100 R12.2
NetJ2_3: J2.3 R13.2 | length 93.2
  Top Layer w10: J2.3 140.35,1033.82 R13.2
NetP4_1: P4.1 U2.20 | length 801.4
  Top Layer w10: P4.1 59,509 478.63,509 489.63,498 584.77,498 650,563.23 650,730.04 U2.20
NetP4_3: P4.3 U2.19 | length 797.9
  Top Layer w10: P4.3 141,579 195,525 486.25,525 ; 486.25,524 496.25,514 578.14,514 634,569.86 634,653.63 622.99,664.64 U2.19
NetP5_1: P5.1 U2.21 | length 921.5
  Top Layer w10: P5.1 5,485 20,470 75,470 97.81,492.81 472.19,492.81 483,482 597,482 685.98,570.98 U2.21
NetP5_3: P5.3 U2.18 | length 861.4
  Top Layer w10: P5.3 5,579.06 55.94,630 120,630 209,541 492.88,541 503.88,530 571.51,530 615,573.49 615,650 591.5,673.5 U2.18
NetR8_2: R8.2 U1.10 | length 82.2
  Top Layer w10: U1.10@1319.45,1062.36 1384.17,1062.36 R8.2
NetR9_2: R9.2 U1.23 | length 117.8
  Top Layer w10: R9.2 1025,1235 1071.42,1188.58 U1.23@1071.42,1152.91
NetR12_1: R12.1 U2.3 | length 137
  Top Layer w10: R12.1 250,1100 300.51,1049.49 U2.3
NetR13_1: R13.1 U2.4 | length 129.3
  Top Layer w10: R13.1 277.37,1050 309.38,1017.99 U2.4
NetR14_2: R14.2 U2.33 | length 119.5
  Top Layer w10: U2.33 807.48,1112.48 840,1145 R14.2
NetR18_2: R18.2 U3.6 | length 96.5
  Top Layer w20: U3.6 2210,593.46 R18.2
NetR19_2: R19.2 R20.1 U3.2 | length 138.3
  Top Layer w20: R20.1 R19.2 2160,278.46 U3.2
NetR22_1: R22.1 R23.2 U3.4 | length 110.1
  Top Layer w20: U3.4 2277.05,328.46 R23.2 R22.1
NetR24_1: R24.1 U9.3 | length 99.3
  Bottom Layer w15: U9.3 2307.4,1167.4 R24.1
NetR25_1: R25.1 U9.1 | length 190.2
  Bottom Layer w8: U9.1 2185,1271.54 R25.1
NetR26_1: R26.1 U9.2 | length 204.7
  Bottom Layer w8: U9.2 2235,1160 2270,1195 2270,1271.54 R26.1
NetR38_2: R38.2 R39.2 U5.3 | length 139.6
  Top Layer w7: R39.2 1525.87,392.6 U5.3
  Top Layer w10: R39.2 1500,461.54 R38.2@1508.46,470
NetR50_2: R50.2 U5.4 | length 60.5
  Top Layer w7: U5.4 1713.94,392.6 R50.2
NetRP1_1: RP1.1 U1.45 | length 102.1
  Top Layer w8: U1.45@1209.21,834.02 U1.45 1209.21,795.79 1219.53,785.47 RP1.1
NetRP1_2: RP1.2 U1.44 | length 102.1
  Top Layer w8: U1.44@1189.53,834.02 U1.44 1189.53,795.67 1199.84,785.36 RP1.2
NetRP1_3: RP1.3 U1.43 | length 102.1
  Top Layer w8: U1.43@1169.84,834.02 U1.43 1169.84,795.16 1180.16,784.84 RP1.3
NetRP1_4: RP1.4 U1.42 | length 102.1
  Top Layer w8: U1.42@1150.16,834.02 U1.42 1150.16,789.84 1160.47,779.53 RP1.4
NetRP2_1: RP2.1 U1.41 | length 98.2
  Top Layer w8: RP2.1 1130.47,737.13 U1.41 U1.41@1130.47,834.02
NetRP2_2: RP2.2 U1.40 | length 98.2
  Top Layer w8: RP2.2 1110.79,737.13 U1.40 U1.40@1110.79,834.02
NetRP2_3: RP2.3 U1.39 | length 98.2
  Top Layer w8: RP2.3 1091.1,737.13 U1.39 U1.39@1091.1,834.02
NetRP2_4: RP2.4 U1.38 | length 98.2
  Top Layer w8: RP2.4 1071.42,737.13 U1.38 U1.38@1071.42,834.02
NetTP1_1: TP1.1 U1.26 | length 125.1
  Top Layer w10: TP1.1 935,1113.38 966.34,1082.05 U1.26@1000.55,1082.05
NetTP2_1: TP2.1 U1.24 | length 34.7
  Top Layer w10: TP2.1 1027.09,1152.91 U1.24@1051.73,1152.91
PG: U9.6
PN532_27: P5.2 P6.1 | length 187
  Top Layer w10: P6.1 -40,525 -23,542 P5.2
PN532_28: P4.2 P6.2 | length 210.7
  Top Layer w10: P4.2 v1(98,542)
  Bottom Layer w10: P6.2 98,428 v1(98,542)
POE1: D6.2 J1.7 | length 149.1
  Bottom Layer w30: J1.7 1737.43,1166 D6.2
POE2: D6.1 J1.8 | length 559.7
  Bottom Layer w30: J1.8 1640,1265 1755,1265 1885,1135 1885,1035 1845,995 D6.1
RXLED: R17.1 U2.8 | length 646.2
  Top Layer w8: U2.8 372.01,892.01 v1(390,910)
  Bottom Layer w8: R17.1 116.54,1183.46 v1(390,910)
RXN: C2.1 R7.1 U1.5 | length 433.5
  Top Layer w10: v1(1265,1010) 1262.74,1010 1240,987.26 1240,965 1247.81,957.19 1274.82,957.19 1281.56,963.94 U1.5@1319.45,963.94
  Bottom Layer w10: v1(1265,1010) 1265,1005 1270,1005 1305,1040 1305,1155 1330,1180 R7.1 C2.1
RXP: C1.1 R6.1 U1.6 | length 262.4
  Top Layer w10: v1@1270,975 1270,983.62 U1.6@1319.45,983.62
  Bottom Layer w10: v1(1265,980) 1275,980 1338.46,1043.46 R6.1 C1.1
TXLED: R15.1 U2.22 | length 1714.3
  Top Layer w10: v1(265,470) 269,466 616,466 717.48,567.48 U2.22
  Bottom Layer w10: R15.1 -63.46,798.46 v1(265,470)
TXN: J1.2 R3.1 U1.1 | length 439
  Top Layer w10: U1.1@1319.45,885.2 1367.18,885.2 1412.37,840 1522.26,840 1591,908.74 J1.2
  Bottom Layer w10: R3.1 1479.46,916 J1.2
TXP: J1.1 R4.1 U1.2 | length 427.1
  Top Layer w10: U1.2@1319.45,904.88 1320.02,904.31 1370.69,904.31 1410,865 v1(1515,865)
  Bottom Layer w10: R4.1 1484.46,866 J1.1
VUSB: C27.1 D5.1 J2.1 U2.7 | length 609.8
  Top Layer w10: J2.1 v1(70,1110) ; v1(296.5,923.5) U2.7
  Top Layer w20: D5.1 12.32,1294.21 C27.1 ; v1(70,1110) C27.1@70,1232.32
  Bottom Layer w10: v1(70,1110) 110,1110 v1(296.5,923.5)
pads on no net: D4.0 D5.0 D9.0 D10.0 D12.0 J1.13 J2. J2.4 J2.HOLE RP3.5 U1.7 U1.12 U1.13 U1.18 U1.46 U1.47 U2.12 U2.28 U2.29 U2.36 U2.37 U2.38 U2.39 U2.40 U2.41 U2.42 U5.0 U9.7

## Polygon pours and split planes (outlines as drawn)
GND on Bottom Layer "Bottom Layer-No Net" (solid, remove dead copper, pour order 4): -120,1495 -120,60 2385,60 2385,1495
GND on Top Layer "Bottom Layer-No Net" (solid, remove dead copper, pour order 6): -120,1495 -120,60 2385,60 2385,1495

## Keep-outs
Keep-Out Layer:
  lines w10: -120,-80 -120,1650 40,1650 195,1495 2090,1495 2245,1650 2385,1650 2385,-80 2235,-80 2095,60 185,60 45,-80 -120,-80

## Other copper
Top Layer:
  pour cut-out: 1540,1495 2385,1495 2385,674.8 2050,674.8 1540,675
Bottom Layer:
  pour cut-out: 1540,1495 2385,1495 2385,675 2384.45,675.55 2384.45,675 2050,675 1540,675.55

## Silkscreen, mask and mechanical layers (free items; w line width, h text height)
Top Overlay:
  lines w10: 1405.02,1294.98 1503.32,1294.98 1503.32,1220 1405,1220 1405,1235 1405,1295 ; 1405,1295 1405.02,1294.98 ; 1130,405 1130,520 1200,520 1200,405 1130,405 ; 1525,1365 1525,1445 1645,1445 1645,1370 1640,1365 1525,1365 ; 2310,645 2310,710 2370,710 2370,645 2310,645
  text "TX" at 35,1430 h30
  text "RX" at 220,1430 h30
  text "Card9 rev.3" at 1735,1425 h40
  text "ICSP" at 715,1420 h30
  text "6" at 1595,1380 h30
  text "3" at 1460,1235 h30
  text "RESET" at 85,600 h30
  text "7" at 2350,600 h30
  text ">I2C" at 90,550 h30
  text ">HSU" at 90,505 h30
  text "4" at 1145,460 h30
  text "Lock" at 1010,450 h30
  text "DoorRelease" at 365,445 h30
  text "RFID" at -75,440 h30
  text "+12" at 1225,95 h30
  text "ALM" at 1340,95 h30
  text "+5V" at 120,90 h30
  text "GND" at 220,90 h30
  text "GND" at 525,90 h30
  text "+12" at 710,90 h30
  text "DRV" at 805,90 h30
  text "DECT" at 915,90 h30
  text "GND" at 1045,90 h30
Top Solder:
  text "5" at 270,1325 h30
  text "1" at 930,1145 h30
  text "2" at 1010,1145 h30
Bottom Solder:
  rectangle: 1910,80 2280,510

## Text inside footprints (layer, text, board x,y; h text height)
D6: Bottom Overlay "~" at 1958,1106 h60 r90; Bottom Overlay "~" at 1958,1026 h60 r90; Bottom Overlay "+" at 1980,1106 h60 r90; Bottom Overlay "-" at 1981,1022 h60 r90